# Altium PCB ADC_PCB.PcbDoc
Units mil, origin at the board's own origin, x right, y up, seen from the top; angles counter-clockwise.
Board outline 2055 x 1795 mil, 4 copper layers (Top Layer, Layer 1, Layer 2, Bottom Layer), stack 60.6 mil thick; 32 components, 24 nets, 124 pads, 321 vias.
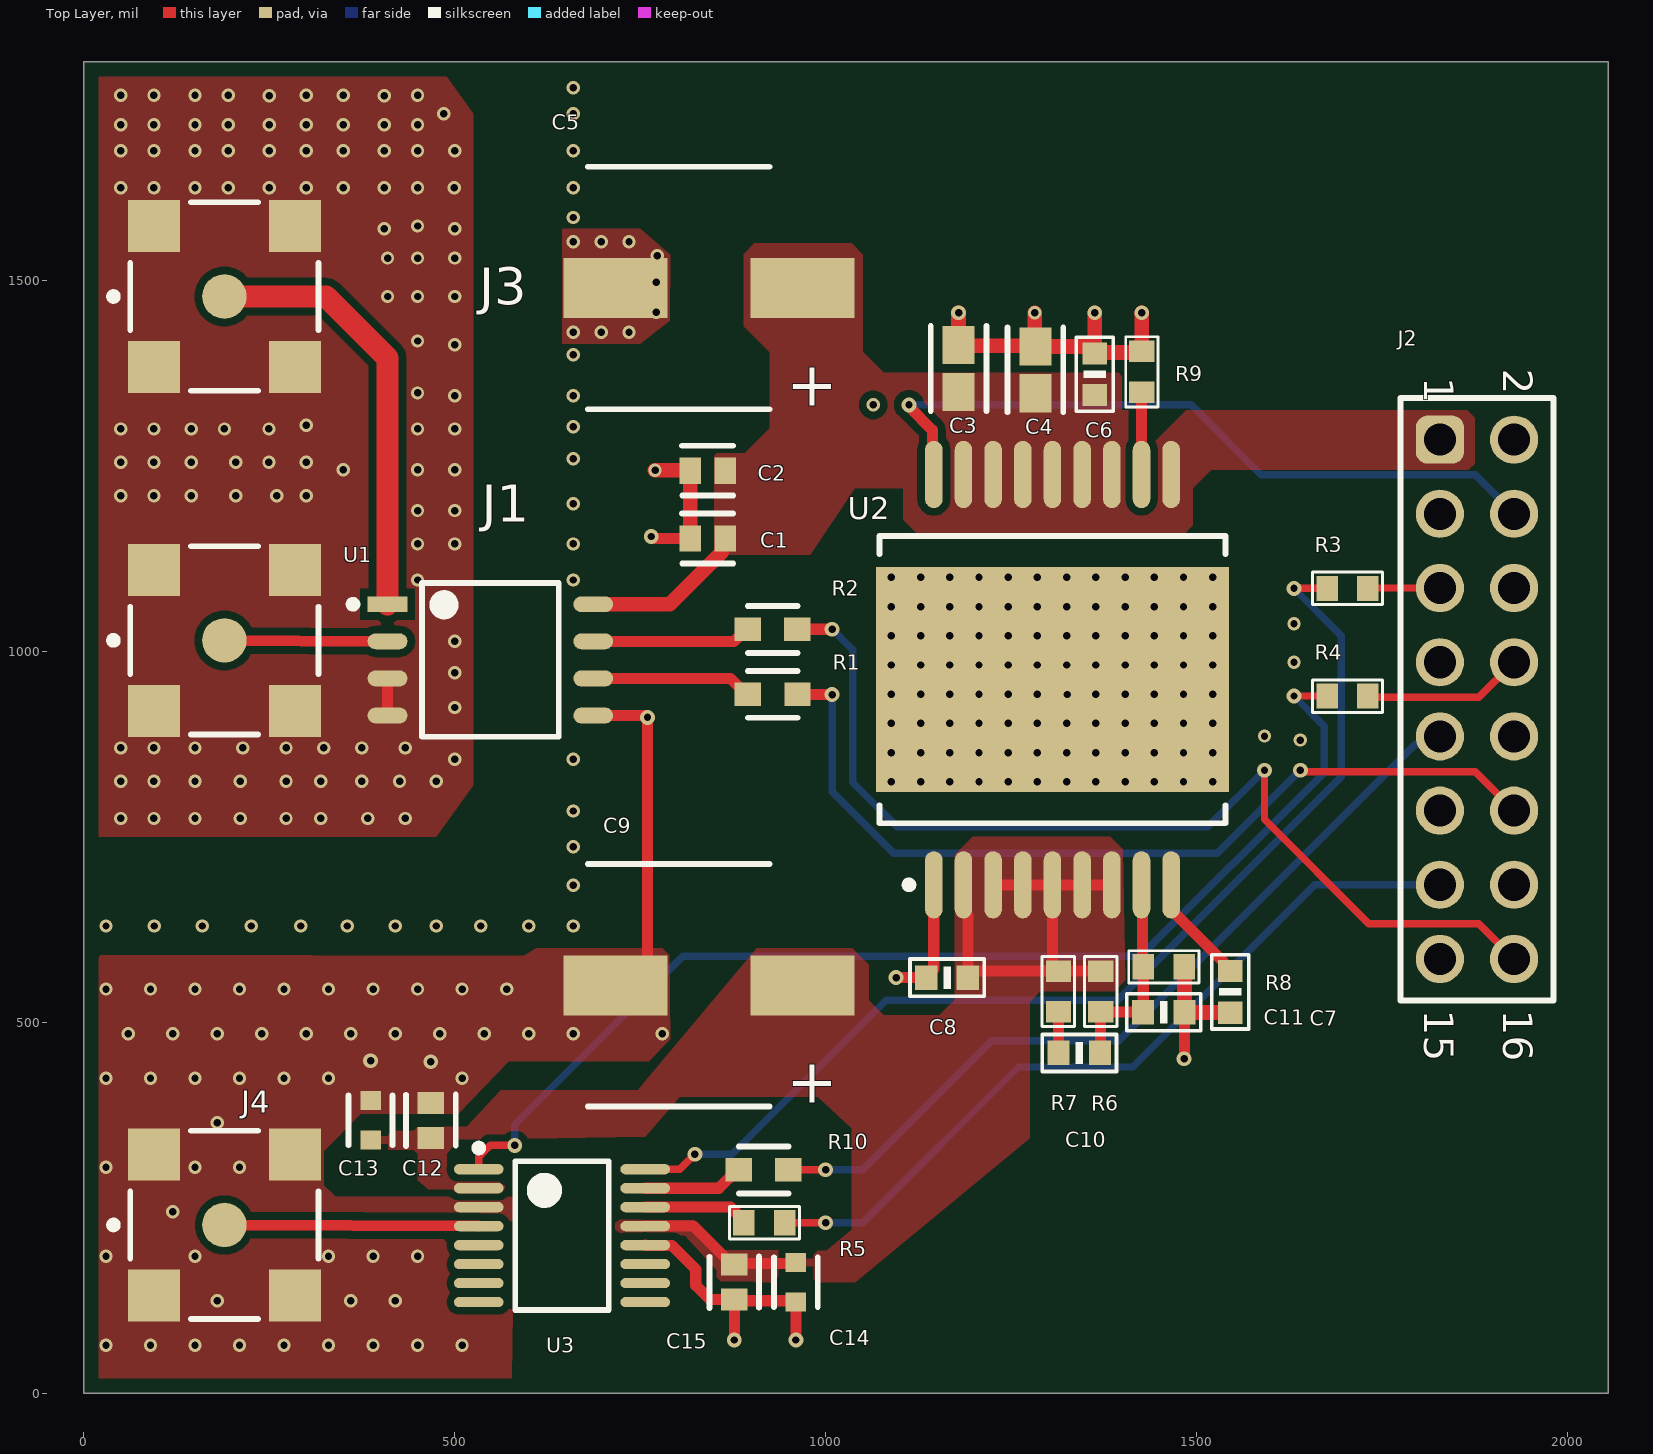
[diagram p0: Top Layer view]
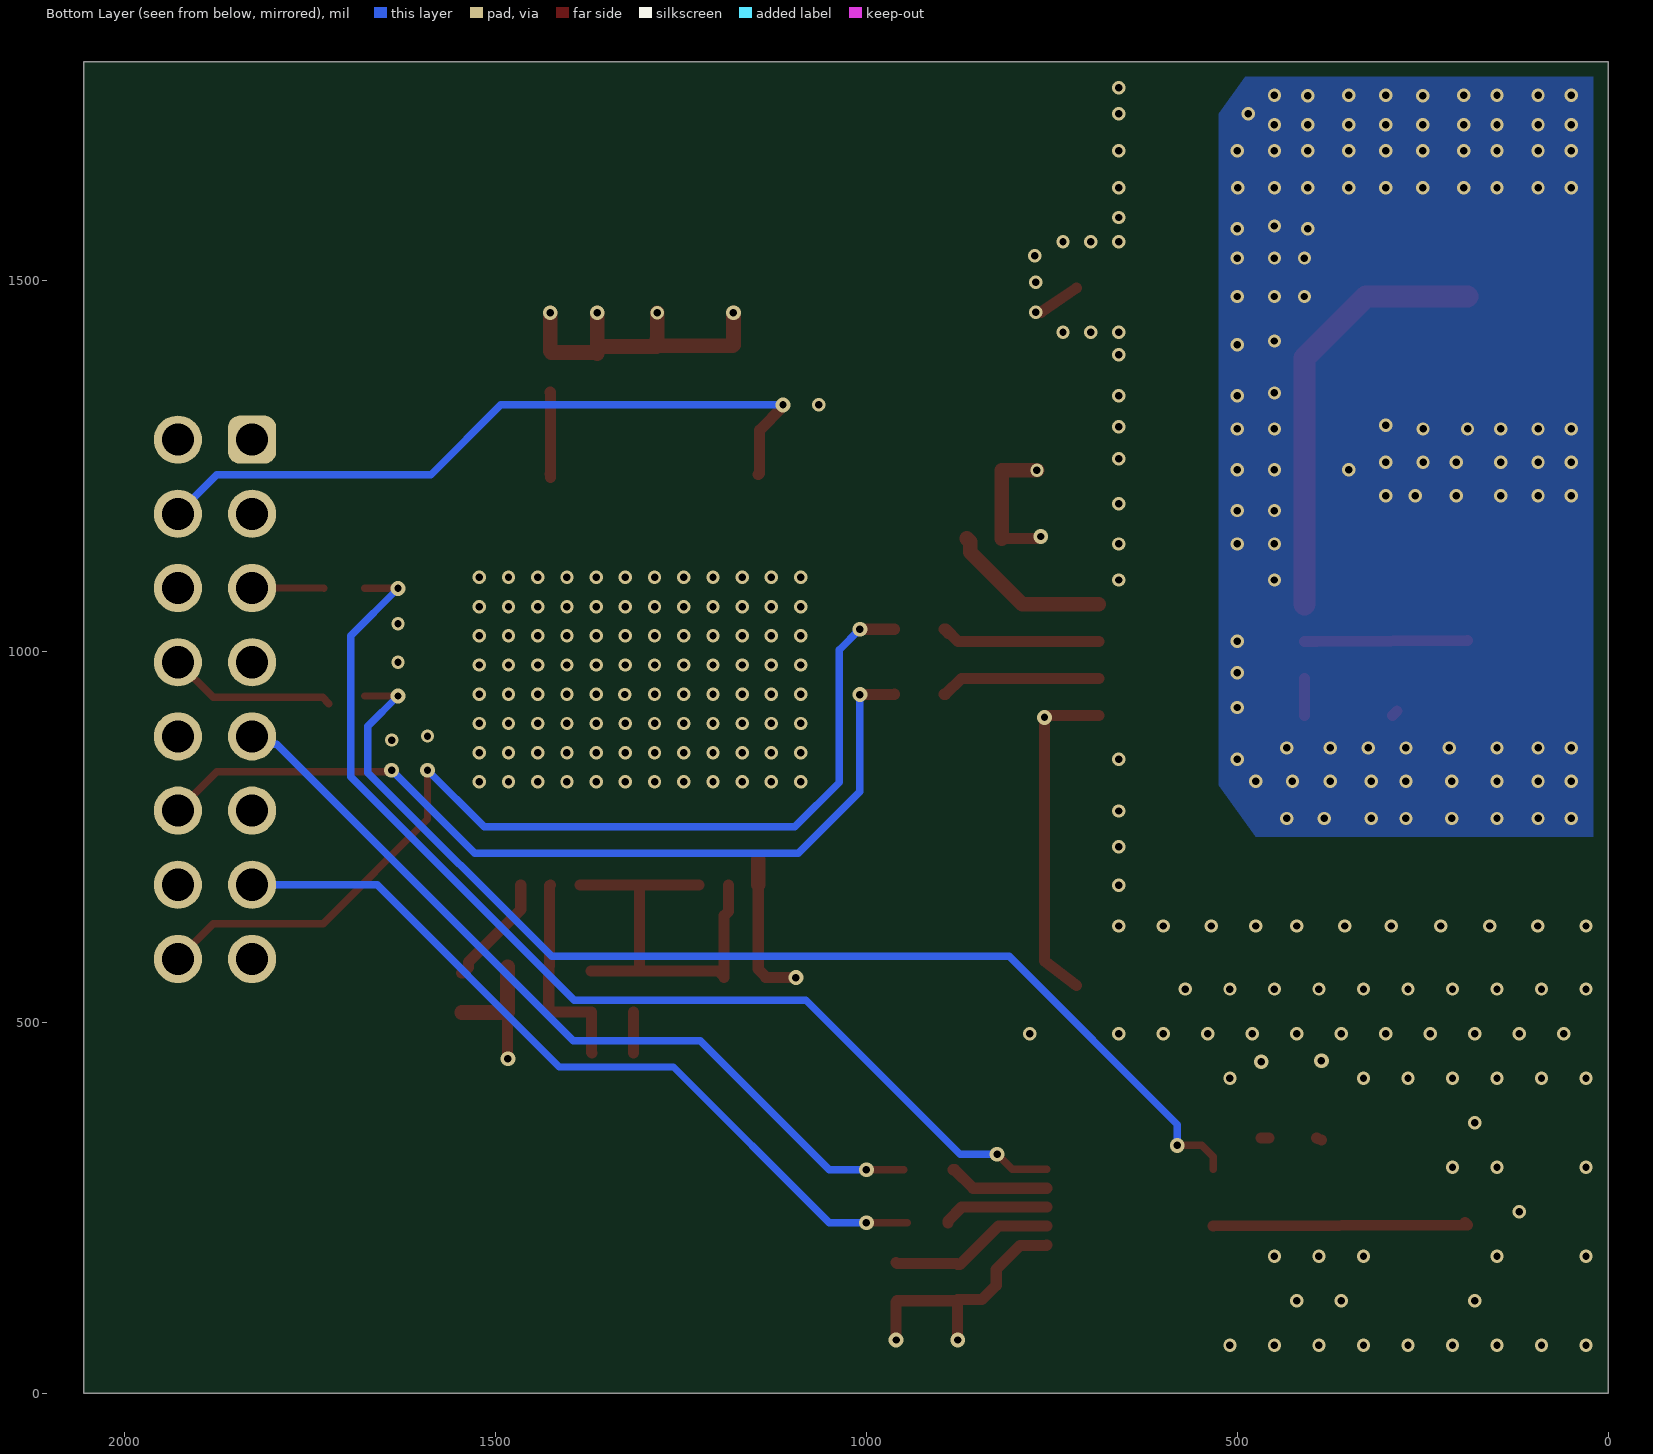
[diagram p1: Bottom Layer view, seen from below]
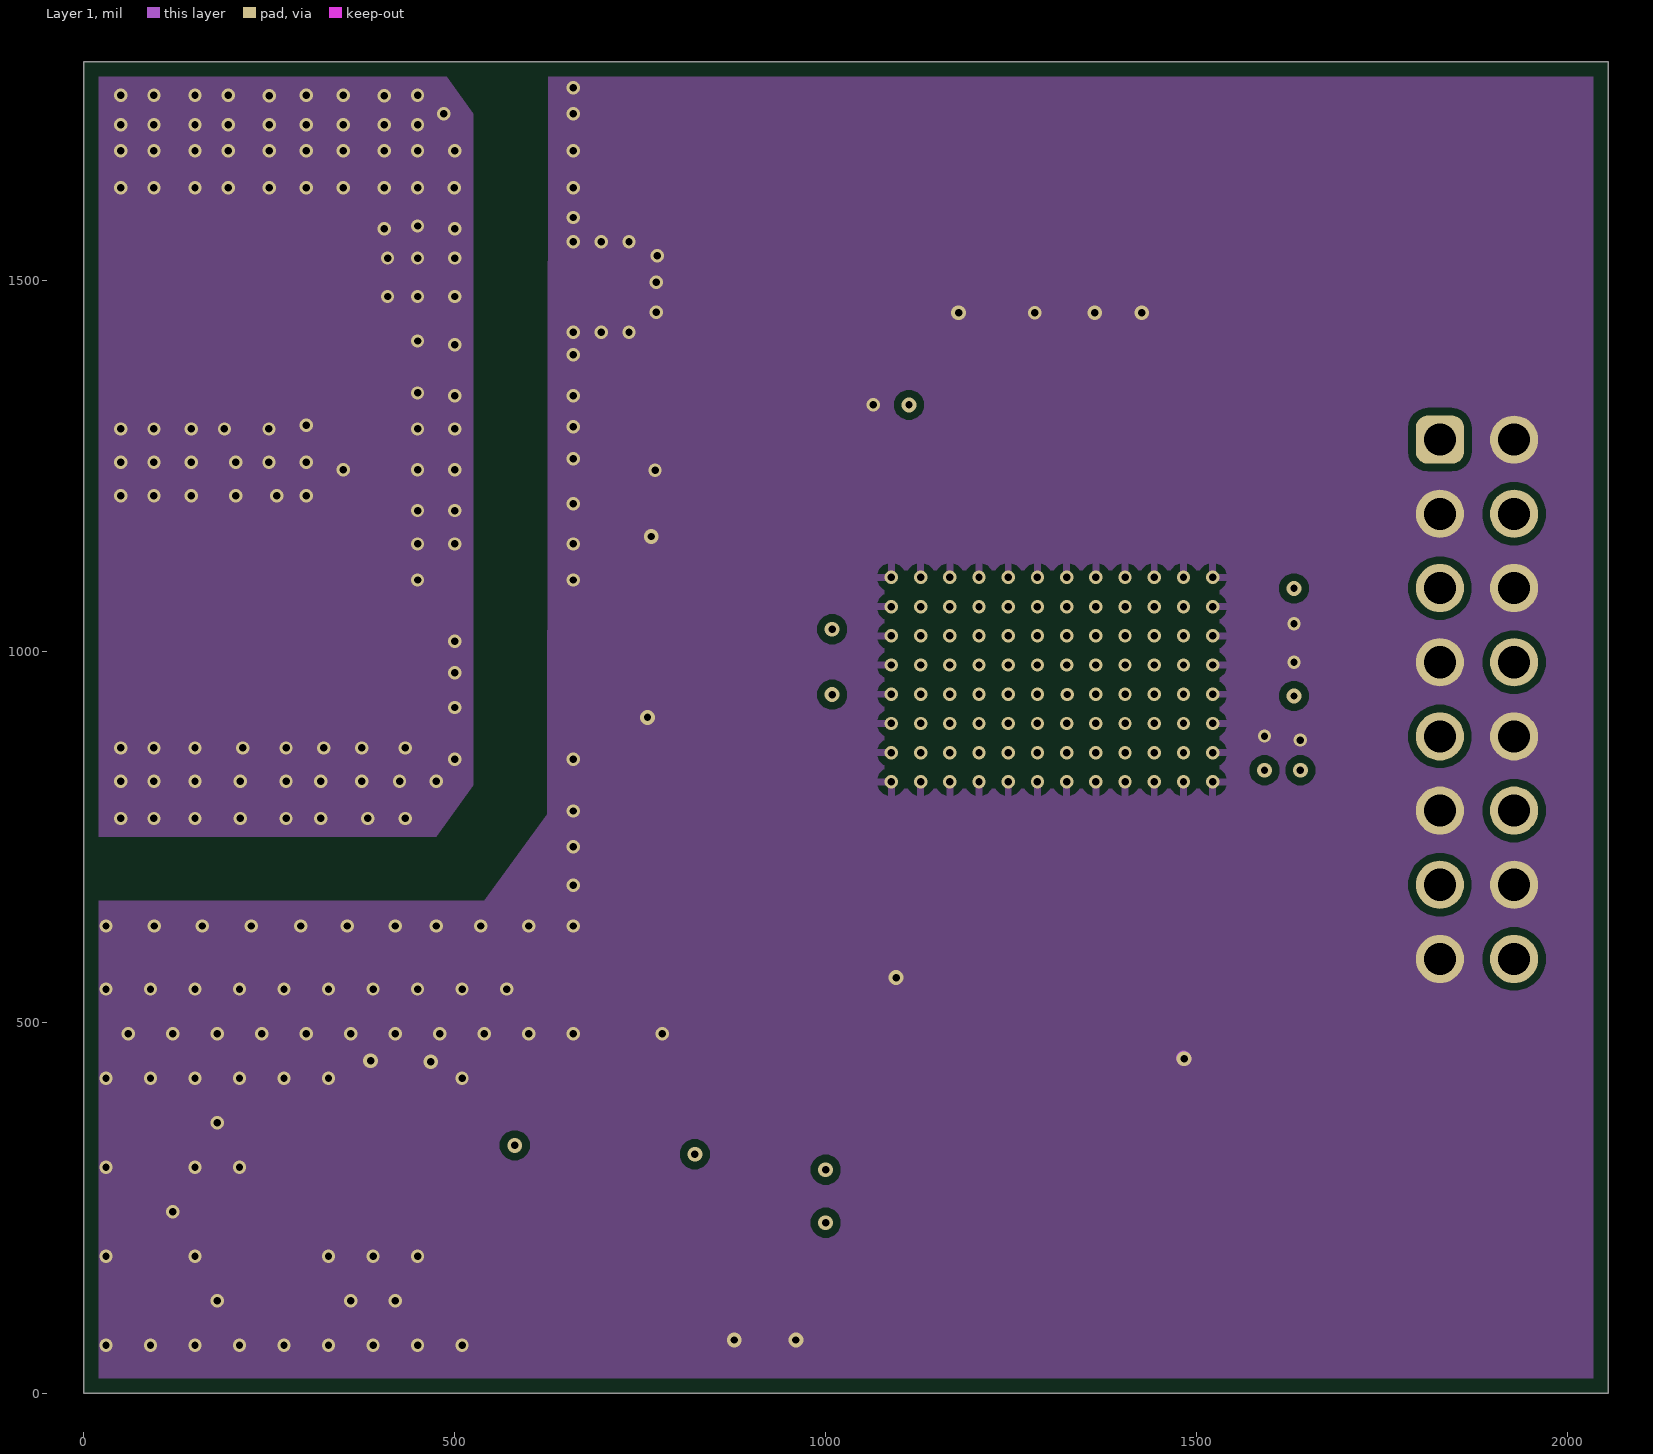
[diagram p2: Layer 1]
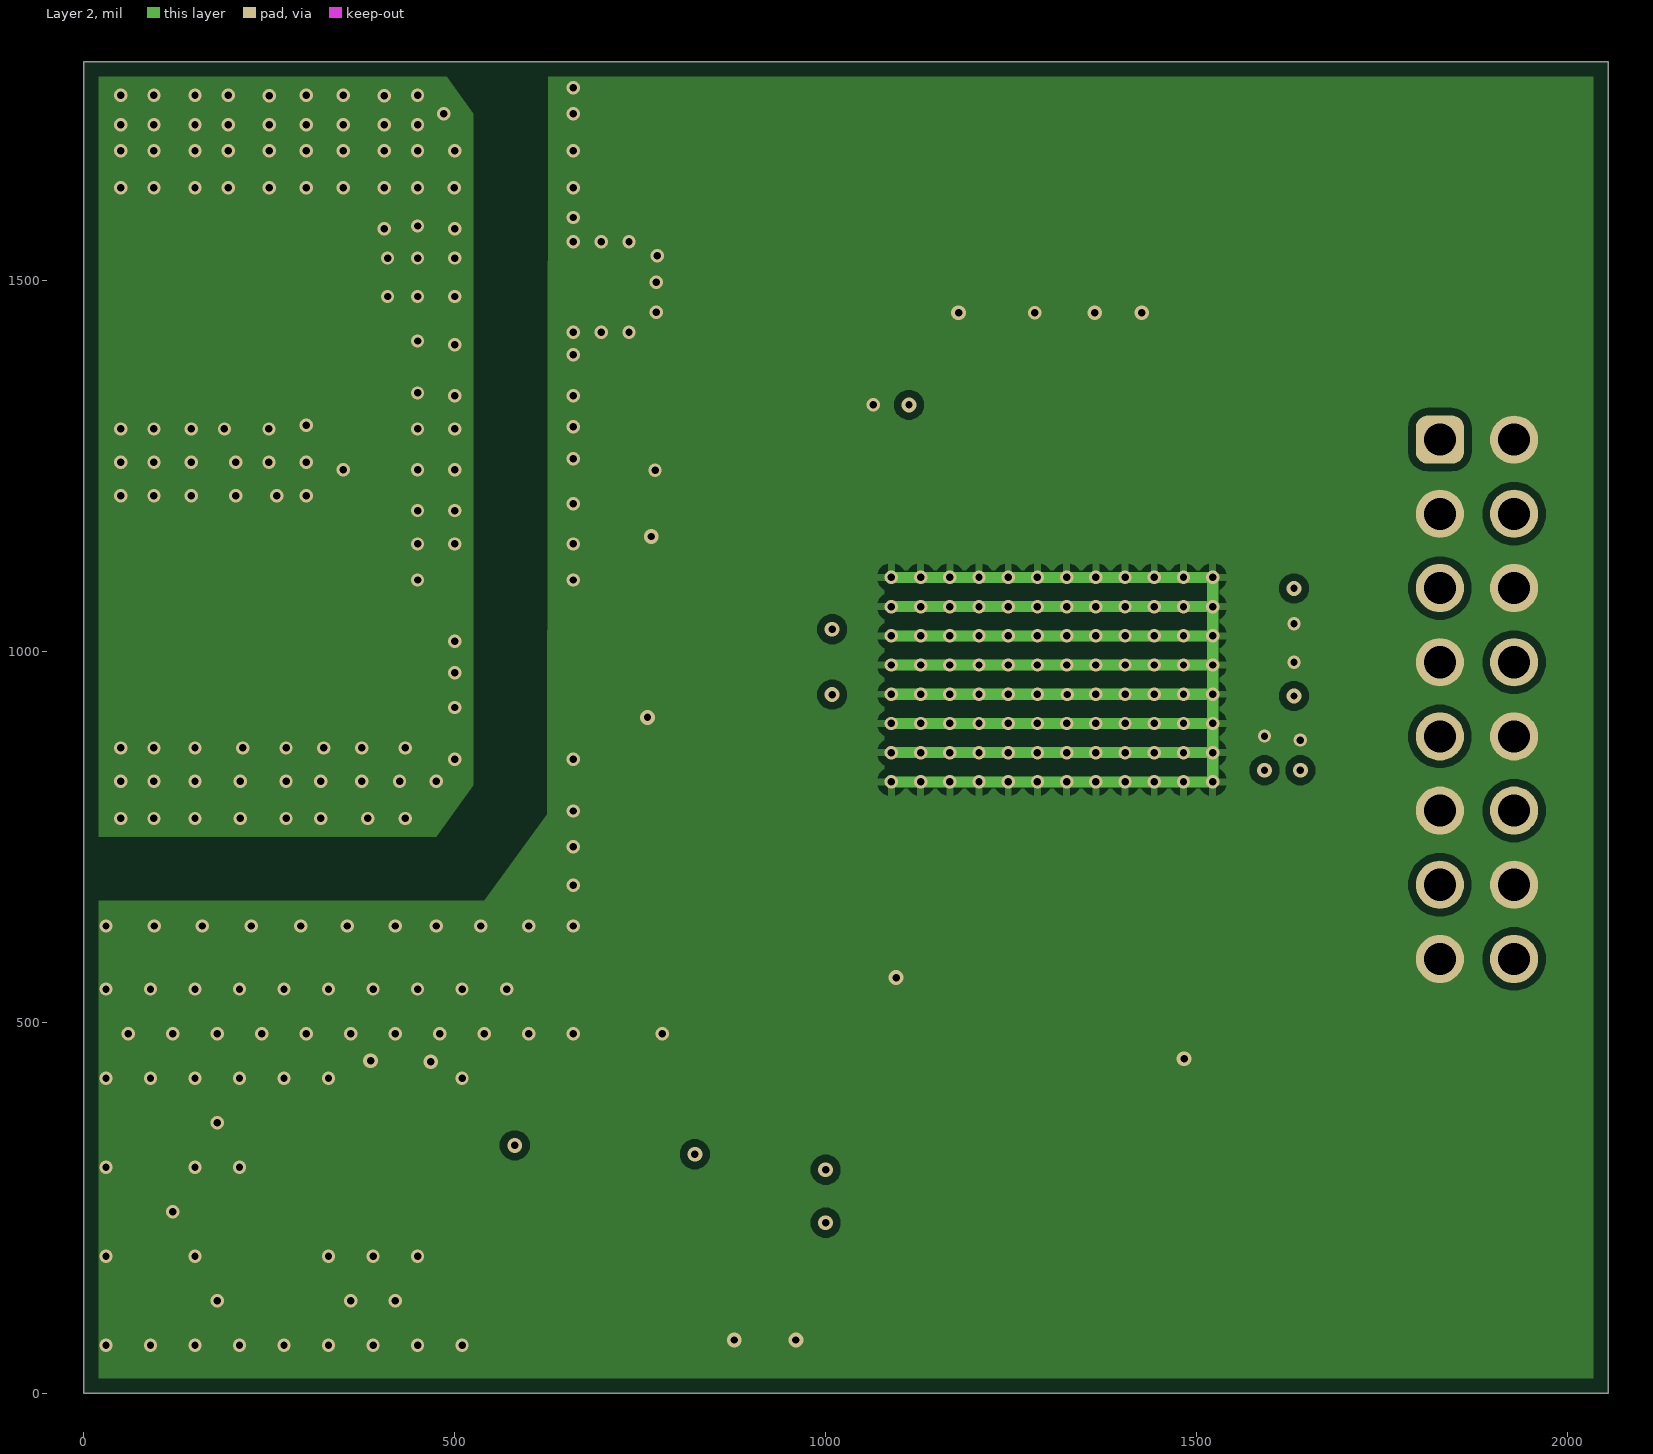
[diagram p3: Layer 2]
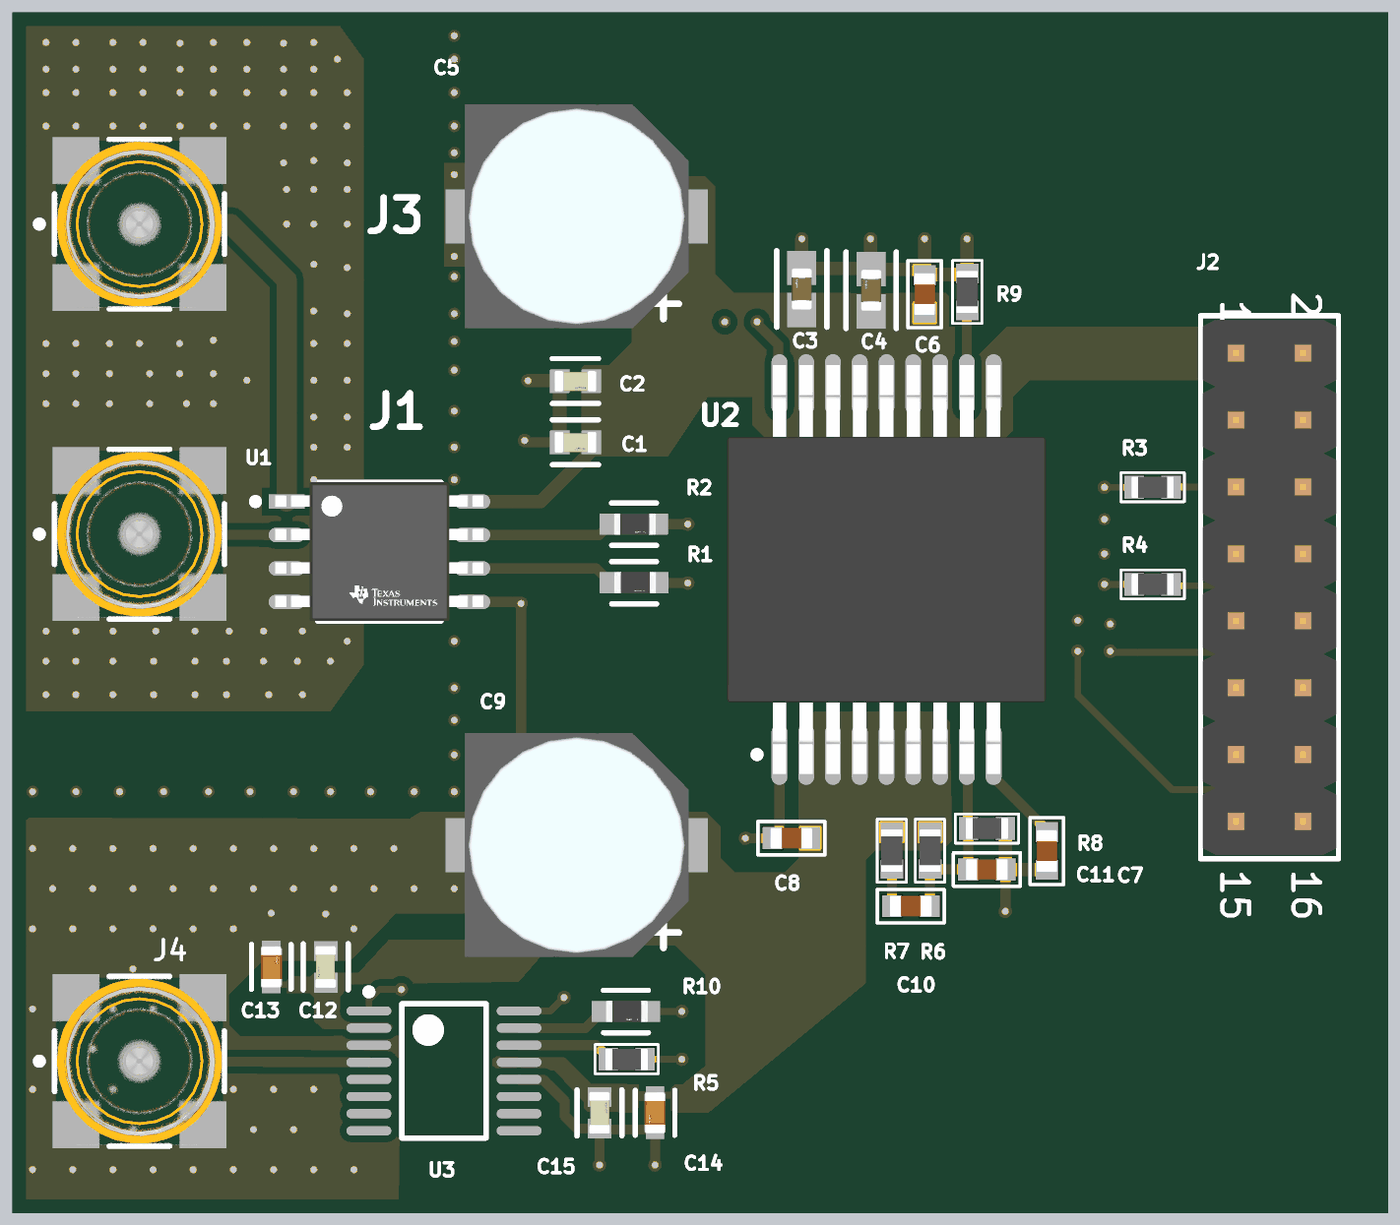
[diagram p4: 3D render of the assembled board from above, using the file's embedded part models]

## Layer stack, top to bottom
Top Solder: solder mask 0.4, Solder Resist, Dk 3.5
Top Layer: signal copper 1.4
Dielectric 2: prepreg 5, PP-006, Dk 4.1
Layer 1: signal copper 1.4
Dielectric 1: dielectric 45, FR-4, Dk 4.8
Layer 2: signal copper 1.4
Dielectric 3: prepreg 5, PP-006, Dk 4.1
Bottom Layer: signal copper 1.4
Bottom Solder: solder mask 0.4, Solder Resist, Dk 3.5

## Board outline
0,0 0,1795 2055,1795 2055,0

## Design rules (kind name [scope] priority, off if disabled: settings)
BoardOutlineClearance [All] p1: gap=20 ignorepadtopadclearanceinfootprint=FALSE
Clearance [All] p1: gap=10 ignorepadtopadclearanceinfootprint=FALSE
MinimumSolderMaskSliver [All] p1: minsoldermaskwidth=5
PolygonConnect [All] p1: connectstyle=Relief reliefconductorwidth=10 reliefentries=4 polygonreliefangle="90 Angle" airgapwidth=10
RoutingVias [All] p1: holewidth=10 width=18 viastyle="Through Hole" minholewidth=8 minwidth=16 maxholewidth=20 maxwidth=28
SilkToSilkClearance [All] p1: silktosilkclearance=5
SilkToSolderMaskClearance [IsPad] p1: minsilkscreentomaskgap=1 clearancetoexposedcopper=TRUE
SolderMaskExpansion [All] p1: expansion=0 istentingtop=FALSE
Width [All] p1: maxlimit=30 minlimit=10 preferedwidth=15
27 further rules are at their usual default settings.

## Components (designator, comment, footprint, x,y, rotation, side; value= is the part's Value field where it differs from the comment)
C1 "C0603C104J5RACTU" FP-C0603C-CF-MFG 841.14,1152.28 r180 top value="0.10 μF"
C2 "C0603C104J5RACTU" FP-C0603C-CF-MFG 841.14,1243.83 r180 top value="0.10 μF"
C3 "GRM188R61E106KA73D" FP-GRM188-0_2-IPC_A 1179.24,1381.5 r90 top value=10uF
C4 "GRM188R61E106KA73D" FP-GRM188-0_2-IPC_A 1282.9,1379.63 r90 top value=10uF
C5 "220uF/25V" CAP_AE830X1050N 842.78,1490 r180 top
C6 "0.1uF/50V" CAPC1608X90N 1362.74,1373.78 r90 top
C7 "0.1uF/50V" CAPC1608X90N 1545.39,541.22 r270 top
C8 "0.1uF/50V" CAPC1608X90N 1163.76,560.42 r180 top
C9 "220uF/25V" CAP_AE830X1050N 842.78,550 r180 top
C10 "4.7nF" CAPC1608X90N 1342.01,458.84 r0 top
C11 "100pF" CAPC1608X90N 1455.82,513.68 r0 top
C12 "C0603C104J5RACTU" FP-C0603C-CF-MFG 467.88,368.03 r90 top value="0.10 μF"
C13 "GCM188R71E105KA64D" FP-GCM188-0_1-MFG 386.64,368.03 r90 top
C14 "GCM188R71E105KA64D" FP-GCM188-0_1-MFG 960,150 r270 top
C15 "C0603C104J5RACTU" FP-C0603C-CF-MFG 876.97,149.97 r270 top value="0.10 μF"
J1 "73251-1350" FP-73251-1350-MFG 189.68,1015 r0 top
J2 "61301621121" 61301621121 1878.05,935.57 r270 top
J3 "73251-1350" FP-73251-1350-MFG 189.68,1478.53 r0 top
J4 "73251-1350" FP-73251-1350-MFG 189.68,227.04 r0 top
R1 "RT0603DRD0722RL" FP-RT0603-MFG 928.58,942.45 r0 top value=22Ω
R2 "RT0603DRD0722RL" FP-RT0603-MFG 928.46,1030 r0 top value=22Ω
R3 "22R" RESC1608X55N 1703.5,1085 r0 top
R4 "22R" RESC1608X55N 1703.5,940 r180 top
R5 "22R" RESC1608X55N 917.56,230 r0 top
R6 "4.32K" RESC1608X55N 1370.89,541.73 r90 top
R7 "2.67K" RESC1608X55N 1313.79,541.73 r90 top
R8 "806R" RESC1608X55N 1455.91,574.97 r180 top
R9 "511R" RESC1608X55N 1426.21,1377.06 r270 top
R10 "RT0603DRD0722RL" FP-RT0603-MFG 916.37,301.45 r0 top value=22Ω
U1 "AMC1203BPSA" FP-PSA0008A-IPC_C 548.18,988.74 r0 top
U2 "ISL75051ASEHVFE" CFP102P1520X310-18AN 1305.82,962.08 r90 top
U3 "ADC128S102CIMTX" MTC16_N 644.64,212.63 r0 top locked

## Footprints (in the part's own frame and the unit in brackets; to place one, negate y for a bottom-side part, rotate by r counter-clockwise, add the part's x,y. Pads: shape width x height; smd on the part's side, far side on the other; paste and mask are expansions set on the pad)
61301621121 [mm] "Pin Header, pitch 2.54 mm, THT, Vertical, dual row, 16p"
  rrect50% 1.65x1.65 hole 1.1: 1(-8.89,-1.27)
  round 1.65 hole 1.1: 2(-8.89,1.27) 3(-6.35,-1.27) 4(-6.35,1.27) 5(-3.81,-1.27) 6(-3.81,1.27) 7(-1.27,-1.27) 8(-1.27,1.27) 9(1.27,-1.27) 10(1.27,1.27) 11(3.81,-1.27) 12(3.81,1.27) 13(6.35,-1.27) 14(6.35,1.27) 15(8.89,-1.27) 16(8.89,1.27)
  silkscreen extent -10.31,-2.62 10.31,2.62, body extent -10.16,-2.54 10.16,2.54, height 8.59
CAP_AE830X1050N [mm]
  rect 3.55x2.05 smd: 1(-3.2,0) 2(3.2,0)
  silkscreen extent -2.07,-4.15 4.15,4.15, body extent -4.25,-4.25 4.25,4.25, height 10.5
CAPC1608X90N [mil]
  rect 30x33 smd mask+2: 1(-28,0) 2(28,0)
  silkscreen extent -50,-25 50,25, body extent -31,-16 31,16, height 35
CFP102P1520X310-18AN [mm]
  oval 2.3x0.6 smd: 1(-7.025,4.064) 2(-7.025,3.048) 3(-7.025,2.032) 4(-7.025,1.016) 5(-7.025,0) 6(-7.025,-1.016) 7(-7.025,-2.032) 8(-7.025,-3.048) 9(-7.025,-4.064) 10(7.025,-4.064) 11(7.025,-3.048) 12(7.025,-2.032) 13(7.025,-1.016) 14(7.025,0) 15(7.025,1.016) 16(7.025,2.032) 17(7.025,3.048) 18(7.025,4.064)
  rect 7.7x12.09 smd paste-5.969: EP(0,0)
  silkscreen extent -7.15,-5.92 4.91,5.92, body extent -7.77,-6.04 7.77,6.04, height 3.1
FP-73251-1350-MFG [mil]
  round 60 smd paste+0 mask+0: 1(0,0)
  rect 70x70 smd paste+0 mask+0: 2(-95,95) 3(95,95) 4(-95,-95) 5(95,-95)
  silkscreen extent -155,-127 127,127, body extent -134,-134 134,134, height 10
FP-C0603C-CF-MFG [mm]
  rect 0.75x0.9 smd paste+0 mask+0: 1(-0.6,0) 2(0.6,0)
  silkscreen extent -0.87,-0.85 0.88,0.85, body extent -1.2,-0.6 1.2,0.6, height 0.25
FP-GCM188-0_1-MFG [mm]
  rect 0.65x0.7 smd paste+0 mask+0: 1(-0.675,0) 2(0.675,0)
  silkscreen extent -0.85,-0.75 0.85,0.75, body extent -1.1,-0.55 1.1,0.55, height 0.25
FP-GRM188-0_2-IPC_A [mil]
  rect 51.38x43.55 smd paste+0 mask+0: 1(-31.52,0) 2(31.52,0)
  silkscreen extent -57,-38 57,38, body extent -77,-41 77,41, height 10
FP-PSA0008A-IPC_C [mil]
  rect 53.76x21.49 smd paste+0 mask+0: 1(-138.6,75)
  rrect100% 53.76x21.49 smd paste+0 mask+0: 2(-138.6,25) 3(-138.6,-25) 4(-138.6,-75) 5(138.6,-75) 6(138.6,-25) 7(138.6,25) 8(138.6,75)
  silkscreen extent -190,-104 92,104, body extent -169,-108 169,108, height 10
FP-RT0603-MFG [mm]
  rect 0.9x0.8 smd paste+0 mask+0: 1(-0.85,0) 2(0.85,0)
  silkscreen extent -0.85,-0.81 0.86,0.8, body extent -1.4,-0.55 1.4,0.55, height 0.25
MTC16_N [mm] "TSOP, 16-Leads, Body 5x4.4mm, Pitch 0.65mm, IPC Medium Density"
  oval 1.7x0.35 smd: 1(-2.85,2.275) 2(-2.85,1.625) 3(-2.85,0.975) 4(-2.85,0.325) 5(-2.85,-0.325) 6(-2.85,-0.975) 7(-2.85,-1.625) 8(-2.85,-2.275) 9(2.85,-2.275) 10(2.85,-1.625) 11(2.85,-0.975) 12(2.85,-0.325) 13(2.85,0.325) 14(2.85,0.975) 15(2.85,1.625) 16(2.85,2.275)
  silkscreen extent -2.97,-2.55 1.6,3.12, body extent -2.25,-2.55 2.25,2.55, height 1.1
RESC1608X55N [mil]
  rect 29x34 smd mask+2: 1(-27.56,0) 2(27.56,0)
  silkscreen extent -47,-22 47,22, body extent -31,-16 31,16, height 22

## Part data
C1 C2 C12 C15: library part CMP-2006-03056-2, "CAP CER 0.1UF 50V 5% X7R 0603", Capacitance="0.10 μF", Manufacturer=KEMET, Package=C0603C-CF, Temperature="-55°C to +125°C", Temperature Characteristic=X7R, Temperature Coefficient=30ppm/°C, Temperature Range High=+125°C, Temperature Range Low=-55°C, Tolerance=0.05, Voltage Rating="50 V", Automotive=Yes, Automotive Grade="Grade 1", Category=Cap, ComponentLink2Description=Datasheet, ComponentLink2URL=https://api.kemet.com/component-edge/download/datasheet/C0603C100J5GACAUTO.pdf, Device Class L1="Passive Components", Device Class L2=Capacitors, Device Class L3="Ceramic Capacitors", Digikey Description="CAP CER 0.1UF 50V 5% X7R 0603", Height=0.87mm, Lead Free=Yes, Manufacturer Part Number=C0603C104J5RACTU, Material=Ceramic, Mouser Description="Multilayer Ceramic Capacitors MLCC - SMD/SMT 50volts 0.1uF X7R 5%", Octopart=https://octopart.com/c0603c104j5ractu-kemet-10440638, RoHS=TRUE
C3 C4: library part CMP-06035-045268-1, "Chip Multilayer Ceramic Capacitors for General Purpose, 0603, 10uF, X5R, 15%, 10%, 25V", Case/Package=0603
C5 C9: library part "CAP ALUM 220UF 20% 25V SMD", "CAP ALUM 220UF 20% 25V SMD", Manufacturer="United Chemi-Con", Manufacturer Part Number=EMZA250ADA221MHA0G, Supplier Part Number 1=565-2550-1-ND, Tolerance=±20%, ComponentLink1Description="New link", Height=10.5mm
  C5: Supplier 1=DigiKey, Supplier 2=Mouser, Supplier Part Number 2=667-EEE-FK1E221P
  C9: Supplier 1=Digi-Key
C6 C7 C8: library part "CAP CER 0.1UF 50V X7R 0603", "CAP CER 0.1UF 50V X7R 0603", Manufacturer="Samsung Electro-Mechanics", Manufacturer Part Number=CL10B104KB8NNNC, Package=0603, Supplier Part Number 1=1276-1000-1-ND, Tolerance=±10%, Voltage - Rated=50V, ComponentLink1Description="New link", Height=0.9mm, Supplier 1=Digi-Key
C10: library part "CAP CER 4700PF 50V C0G 0603", "CAP CER 4700PF 50V C0G 0603", Manufacturer="TDK Corporation", Manufacturer Part Number=CGA3E2C0G1H472J080AA, Package=0603, Supplier Part Number 1=445-6912-1-ND, Tolerance=5%, Voltage - Rated=50V, ComponentLink1Description="New link", Height=0.9mm, Supplier 1=Digi-Key
C11: library part "CAP CER 100PF 50V C0G/NP0 0603", "CAP CER 100PF 50V C0G/NP0 0603", Manufacturer="KYOCERA AVX", Manufacturer Part Number=06035A101FAT2A, Package=0603, Supplier Part Number 1=478-6202-1-ND, Tolerance=1%, Voltage - Rated=50V, ComponentLink1Description="New link", Height=0.9mm, Supplier 1=Digi-Key
C13 C14: library part CMP-2006-02363-4, Capacitance=1µF, Case Code (Imperial)=0603, Case Code (Metric)=1608, Dielectric=X7R, Manufacturer Lifecycle Status="IN PRODUCTION", Max Operating Temperature=125°C, Min Operating Temperature=-55°C, Ratings=AEC-Q200, Tolerance=10%, Voltage=25V, Case/Package=0603, Depth=800µm, Height=800µm, Lead Free="Lead Free", Length=1.6mm, Lifecycle Status=Production, Material=Ceramic, Mount="Surface Mount", NexarPartId=18909256, Packaging="Cut Tape", Radiation Hardening=No, REACH SVHC="No SVHC", RoHS=Compliant, Schedule B="8532240020, 8532240020", Termination=SMD/SMT, Thickness=889µm, Voltage Rating=25V, Voltage Rating (DC)=25V, Weight=6.293594mg, Width=787.4µm
J1 J3 J4: library part CMP-04764-000006-1, "CONN SMA JACK STR 50 OHM SMD", Frequency=18GHz, Manufacturer=Molex, Temperature="-65°C to +165°C", Temperature Range High=+165°C, Temperature Range Low=-65°C, Voltage Rating=500V, Automotive=No, Category=Conn, ComponentLink2Description=Datasheet, ComponentLink2URL=https://www.molex.com/pdm_docs/sd/732511350_sd.pdf, Conn Orientation=Straight, Contact Material=Gold, Device Class L1=Connectors, Device Class L2="RF / Coaxial Connectors", Device Class L3=unset, Digikey Description="CONN SMA JACK STR 50 OHM SMD", Footprint Url=https://forum.upverter.com/uploads/default/original/3X/d/a/daeafa2ce4908d4fc4e49f0b17d7d2c986fce444.pdf, Height=9.655mm, Impedance=50Ω, Is Female=yes, Lead Free=Yes, Manufacturer Part Number=73251-1350, Mouser Description="RF Connectors / Coaxial Connectors SMA ST PCB-JCK STD SMT", Number of Contacts=1, Octopart=https://octopart.com/73251-1350-molex-5414390, Package=73251-1350, RoHS=TRUE, Shielding=true, Standoff Height=0.41mm
J2: library part CMP-1502-01097-2, Color=Black, Contact Resistance=20mΩ, Current Rating=3A, Max Operating Temperature=105°C, Min Operating Temperature=-40°C, Operating Supply Voltage=250V, Connector Type="Male Pin", Contact Material=Copper, Contact Mating Length=5.9944mm, Contact Plating=Gold, Gender=Male, Height=8.89mm, Lead Pitch=2.54mm, Mount="Through Hole", NexarPartId=32855550, Number of Contacts=16, Number of Pins=16, Number of Positions=16, Number of Rows=2, Orientation=Vertical, Packaging=Bulk, Pitch=2.54mm, REACH SVHC=Unknown, RoHS=Compliant, Row Spacing=2.54mm, Termination=Solder, Voltage Rating=250V
R1 R2 R10: library part CMP-03412-013306-1, "RES SMD 22 OHM 0.5% 1/10W 0603", Manufacturer=Yageo, Package=RT0603, Power Rating=0.1W, Resistance=22Ω, Temperature="-55°C to +155°C", Temperature Coefficient="25 ppm/°C", Temperature Range High=+155°C, Temperature Range Low=-55°C, Tolerance=0.005, Voltage Rating=75V, Automotive=No, Category=Res, ComponentLink2Description=Datasheet, ComponentLink2URL=http://www.yageo.com/documents/recent/PYu-RT_1-to-0.01_RoHS_L_9.pdf, Composition="Thin Film", Device Class L1="Passive Components", Device Class L2=Resistors, Device Class L3="Chip SMD Resistors", Digikey Description="RES SMD 22 OHM 0.5% 1/10W 0603", Footprint Url=http://www.yageo.com/exep/pages/download/literatures/PYu-R_Mount_10.pdf, Height=0.55mm, Ipc Land Pattern Name=RESC16080X45, Lead Free=Yes, Manufacturer Part Number=RT0603DRD0722RL, Octopart=https://octopart.com/rt0603drd0722rl-yageo-1189544, RoHS=TRUE, Series=RT
R3 R4 R5: library part "RES SMD 22 OHM 0.5% 1/10W 0603", "RES SMD 22 OHM 0.5% 1/10W 0603", Manufacturer=Yageo, Manufacturer Part Number=RT0603DRD0722RL, Package=0603, Supplier Part Number 1=13-RT0603DRD0722RLCT-ND, Tolerance=0.5%, Height=0.55mm, Supplier 1=Digi-Key
R6: library part "RES SMD 4.32K OHM 0.5% 1/5W 0603", "RES SMD 4.32K OHM 0.5% 1/5W 0603", Manufacturer="Panasonic Electronic Components", Manufacturer Part Number=ERJ-PB3D4321V, Package=0603, Supplier Part Number 1=P20355CT-ND, Tolerance=0.5%, Height=0.55mm, Supplier 1=Digi-Key
R7: library part "RES SMD 2.67KOHM 0.5% 1/10W 0603", "RES SMD 2.67KOHM 0.5% 1/10W 0603", Manufacturer=Yageo, Manufacturer Part Number=RT0603DRD072K67L, Package=0603, Supplier Part Number 1=311-2.67KDCT-ND, Tolerance=0.5%, Height=0.55mm, Supplier 1=Digi-Key
R8: library part "RES SMD 806 OHM 0.5% 1/10W 0603", "RES SMD 806 OHM 0.5% 1/10W 0603", Manufacturer=Yageo, Manufacturer Part Number=RT0603DRD0762KL, Package=0603, Supplier Part Number 1=311-806DCT-ND, Tolerance=0.5%, Height=0.55mm, Supplier 1=Digi-Key
R9: library part "RES SMD 511 OHM 1% 1/10W 0603", "RES SMD 511 OHM 1% 1/10W 0603", Manufacturer="Panasonic Electronic Components", Manufacturer Part Number=ERJ-3EKF5110V, Package=0603, Supplier Part Number 1=P511HCT-ND, Tolerance=0.5%, Height=0.55mm, Supplier 1=Digi-Key
U1: library part CMP-04860-000036-1, "IC ADC 16BIT SIGMA-DELTA 8SOP", Case/Package=SOP, Max Operating Temperature=105°C, Max Power Dissipation=110mW, Max Supply Voltage=5.5V, Min Operating Temperature=-40°C, Min Supply Voltage=4.5V, Operating Supply Voltage=5V, Package Quantity=95, Power Consumption=80mW, Contact Plating=Gold, Differential Nonlinearity=1LSB, Input Type=DIFFERENTIAL, Integral Nonlinearity (INL)=6LSB, Interface=Serial, Lead Free="Lead Free", Mount="Surface Mount", Number of A/D Converters=1, Number of Analog Inputs=1, Number of Bits=16, Number of Channels=1, Number of Converters=1, Number of Elements=1, Number of Inputs=1, Number of Pins=8, Packaging=Rail/Tube, Polarity=Bipolar, Power Dissipation=80mW, Resolution=16b, RoHS Compliant=Yes, Sampling Rate=40KS/s, Signal to Noise Ratio (SNR)=85dB, Supply Type=Analog
U2: library part CMP-040-000002-1, "Voltage regulator, linear, variable, 3 A, CFP-18 exposed pad, class V", EM Part Number=ISL75051ASEHFE/PROTO, FM (SMD) Part Number=5962R1121203VYC, Input Voltage High=6V, Input Voltage Low=2.2V, Manufacturer="Renesas / Intersil", Output Current Max=3A, Output Voltage="0.8 - 5.0V", Package="CFP-18 (exposed pad)", Available Preview Images=2D, ComponentLink1Description="Datasheet - Manufacturer", ComponentLink1URL=https://www.renesas.com/us/en/www/doc/datasheet/isl75051aseh-3051aseh.pdf, ComponentLink2Description="Datasheet - Mil Spec", ComponentLink2URL=https://landandmaritimeapps.dla.mil/downloads/milspec/smd/11212.pdf, Design Item ID=ISL75051ASEHVFE, Device Class=V, Distributor=Avnet, Lead Form=Yes, Manufacturer Part Number=ISL75051ASEHVFE, Mass=1.07g, Mount Type=SMT, SEL=86.3MeV*cm2/mg, Source=IsolatedADCs.SCHLIB, TID="50krad (LDR), 100krad (HDR)"
U3: library part CMP-0054-00337-2, "8-Channel, 500 kSPS to 1 MSPS, 12-Bit A/D Converter, 16-pin TSSOP", Manufacturer="National Semiconductor", PackageTopMarking=NSUZXYTT*128S102*CIMT, PowerWise=Y, Code_JEDEC=MO-153-AB, ComponentLink1Description="ADC128S102 Datasheet", ComponentLink1URL=http://www.national.com/ds/AD/ADC128S102.pdf, ComponentLink2Description="ADC128S102 Web Page", ComponentLink2URL=http://www.national.com/pf/AD/ADC128S102.html, ComponentLink3Description="MTC16 Package Page", ComponentLink3URL=http://www.national.com/packaging/folders/mtc16.html, CompType="ADC IC", DatasheetVersion=Jul-2009, PackageDescription="Molded TSSOP, Jedec, 5 x 4.4 x 0.9mm Body, 16 Lead, 0.65mm Pitch", PackageReference=MTC16, PackageVersion="revD, Jun-2003", PinCount=16, RevisionNote="Component URLs added", RoHS=N

## Via types
v1: diameter 18, hole 10, Top Layer to Bottom Layer, tented both sides, 203 vias
v2: diameter 18, hole 10, Top Layer to Bottom Layer, 96 vias
v3: diameter 20, hole 10, Top Layer to Bottom Layer, tented both sides, 22 vias

## Nets (pads, with @x,y where several pads share a name; then routed paths per layer and width w, separated by ;. In a path a pad name is that pad's centre, name@x,y a point inside that pad or via, vN(x,y) a via of type N, cw(c..) or ccw(c..) an arc to the next point about the centre after c; other vN are vias at no path point)
3V3: C8.1 C9.1 C12.1 C13.1 C14.1 C15.1 R6.2 R7.2 U2.2 U2.3 U2.4 U2.5 U2.6 U2.7 U3.2 U3.13 | length 821.9
  Top Layer w15: C13.1 C13.1@392.92,344.03 ; C12.1@457.67,344.03 C12.1 ; U3.13 822.19,225.43 874.02,173.59 C15.1 878.46,175.08 958.51,175.08 C14.1 ; U2.2 1185.82,649.71 1191.76,643.77 C8.1@1191.76,561.79 ; C8.1 C8.1@1191.76,561.79 ; U2.3 U2.4 U2.5 ; R7.2@1305.82,576.29 U2.5 ; R6.2 R7.2 1199.26,569.29 C8.1@1191.76,561.79 ; U2.7 U2.6 U2.5
+5V: C1.1 C2.1 C3.1 C4.1 C5.1 C6.1 J2.1 U1.8 U2.10 U2.12 U2.13 U2.14 U2.15 U2.16 U2.17 | length 222.6
  Top Layer w20: U1.8 789.74,1063.74 860,1134 860,1147.52 C1.1
+5V_AN: J3.1 U1.1 | length 586
  Top Layer w30: J3.1 326.47,1478.53 409.58,1395.42 U1.1
AGND: J1.2 J1.3 J1.4 J1.5 J3.2 J3.3 J3.4 J3.5 U1.3 U1.4 | length 58.9
  Top Layer w15: J1.5 J1.5@290.94,913.74 ; U1.4 U1.3
  other v1: 50,775 94.68,775 150,775 210.89,775 272.74,775 319.68,775 382.7,775 433.31,775 50,825 94.68,825 150,825 210.89,825 272.74,825 319.68,825 375,825 425.72,825 475,825 500,855 50,870 94.68,870 150,870 214.24,870 272.74,870 323.62,870 375,870 433.31,870 500,924.48 500,971.34 500,1013.74 450,1096.42 450,1145 500,1145 450,1190 500,1190 50,1210 94.68,1210 145,1210 205,1210 260,1210 300,1210 350,1245 450,1245 500,1245 50,1255 94.68,1255 145,1255 205,1255 249.68,1255 300,1255 50,1300 94.68,1300 145,1300 189.68,1300 249.68,1300 450,1300 500,1300 300,1305 500,1344.59 450,1348.53 500,1413.44 450,1418.53 409.58,1478.53 450,1478.53 500,1478.53 409.58,1530.35 450,1530.35 500,1530.35 405,1570 500,1570 450,1573.53 50,1625 94.68,1625 150,1625 195,1625 250.29,1625 300,1625 350,1625 405,1625 450,1625 499.65,1625 50,1675 94.68,1675 150,1675 195,1675 250.29,1675 300,1675 350,1675 405,1675 450,1675 500,1675 50,1710 94.68,1710 150,1710 195,1710 250.29,1710 300,1710 350,1710 405,1710 450,1710 485.37,1725 250.29,1748.94 405,1748.94 50,1750 94.68,1750 150,1750 195,1750 300,1750 350,1750 450,1750
CS: R4.2 U3.1 | length 1552
  Top Layer w10: U3.1 532.44,318.83 547.91,334.31 v3(580.93,334.31) ; v3(1631.34,940) R4.2
  Bottom Layer w10: v3(580.93,334.31) 580.93,362.48 807.42,588.98 1424.33,588.98 1672.01,836.65 1672.01,899.34 v3(1631.34,940)
DIN: R5.1 U3.14 | length 143.3
  Top Layer w15: U3.14 871.48,251.02 890,232.5 R5.1
DOUT: J2.9 R10.2 | length 1118.7
  Top Layer w10: R10.2 v3@998.55,301.45
  Bottom Layer w10: v3(1000,301.45) 1050,301.45 1223.89,475.34 1395.34,475.34 1795.06,875.06 1817.54,875.06 J2.9
GND: C1.2 C2.2 C3.2 C4.2 C5.2 C6.2 C7.2 C8.2 C9.2 C11.2 C12.2 C13.2 C14.2 C15.2 J2.2 J2.3 J2.6 J2.7 J2.10 J2.11 J2.14 J2.15 J4.2 J4.3 J4.4 J4.5 R8.1 R9.1 U1.5 U2.1 U2.EP U3.3 U3.12 | length 5628.4
  Top Layer w15: U1.5 756.06,913.74 758.54,911.26 v3(759.89,911.26) 759.89,582.85 C9.2 ; C5.2 C5.2@765,1457.15 ; U3.12 757.46,199.22 792.93,199.22 825,167.16 825,145.55 844.2,126.35 C15.2 ; v3(765,1155) 766.35,1155 769.07,1152.28 C1.2 ; v3(876.97,71.97) C15.2 ; v3@960,70 C14.2 958.54,124.89 878.43,124.89 C15.2 ; v3(1095,560.42) C8.2 1135.76,561.92 1145.82,571.98 U2.1 ; v3(1483.29,451.12) 1483.56,451.39 1483.56,513.42 C11.2
  Top Layer w20: v1(770.1,1244.42) 812.76,1244.42 C2.2 C1.2 ; U2.1 U2.1@1145.82,719.95 ; v3(1179.24,1456.52) 1179.24,1428.7 C3.2 1180.17,1412.08 1281.96,1412.08 C4.2 ; v1(1281.96,1456.52) 1281.96,1426.84 C4.2 ; C6.2@1351.87,1411.15 C4.2 ; v3(1362.74,1456.52) C6.2 1364.16,1403.2 1424.79,1403.2 R9.1 v3(1426.21,1456.52) ; R8.1 1483.65,574.79 1483.65,513.86 C11.2 1484.05,513.45 1545.15,513.45 C7.2
  Layer 1 w20: v3@1482.4,452.02 v3(1483.29,451.12)
  Layer 2 w15: v2(1088.7,824.29) v2(1128.07,824.29) v2(1167.44,824.29) v2(1206.81,824.29) v2(1403.66,824.29) v2(1443.03,824.29) v2(1521.77,824.29) v2(1521.77,863.66) ; v2(1088.7,863.66) v2(1167.44,863.66) v2(1206.81,863.66) v2(1246.18,863.66) v2(1285.55,863.66) v2(1324.92,863.66) v2(1364.29,863.66) v2(1403.66,863.66) v2(1443.03,863.66) v2(1521.77,863.66) ; v2(1088.7,903.03) v2(1167.44,903.03) v2(1206.81,903.03) v2(1403.66,903.03) v2(1443.03,903.03) v2(1482.4,903.03) v2(1521.77,903.03) ; v2(1088.7,942.4) v2(1167.44,942.4) v2(1206.81,942.4) v2(1403.66,942.4) v2(1443.03,942.4) v2(1482.4,942.4) v2(1521.77,942.4) ; v2(1088.7,981.77) v2(1285.55,981.77) v2(1324.92,981.77) v2(1364.29,981.77) v2(1403.66,981.77) v2(1443.03,981.77) v2(1482.4,981.77) v2(1521.77,981.77) ; v2(1088.7,1021.14) v2(1128.07,1021.14) v2(1167.44,1021.14) v2(1206.81,1021.14) v2(1246.18,1021.14) v2(1285.55,1021.14) v2(1324.92,1021.14) v2(1364.29,1021.14) v2(1403.66,1021.14) v2(1443.03,1021.14) v2(1482.4,1021.14) v2(1521.77,1021.14) ; v2(1088.7,1060.51) v2(1128.07,1060.51) v2(1167.44,1060.51) v2(1206.81,1060.51) v2(1246.18,1060.51) v2(1285.55,1060.51) v2(1324.92,1060.51) v2(1364.29,1060.51) v2(1403.66,1060.51) v2(1443.03,1060.51) v2(1482.4,1060.51) v2(1521.77,1060.51) ; v2(1088.7,1099.88) v2(1128.07,1099.88) v2(1167.44,1099.88) v2(1206.81,1099.88) v2(1246.18,1099.88) v2(1285.55,1099.88) v2(1324.92,1099.88) v2(1364.29,1099.88) v2(1403.66,1099.88) v2(1443.03,1099.88) v2(1482.4,1099.88) v2(1521.77,1099.88) v2(1521.77,1060.51) ; v2(1521.77,863.66) v2(1521.77,903.03) ; v2(1521.77,903.03) v2(1521.77,942.4) ; v2(1521.77,942.4) v2(1521.77,981.77) ; v2(1521.77,981.77) v2(1521.77,1021.14) ; v2(1521.77,1021.14) v2(1521.77,1060.51)
  other v1: 30,65 90,65 150,65 210,65 270,65 330,65 390,65 450,65 510,65 180,125 360,125 420,125 30,185 150,185 330,185 390,185 450,185 120,245 30,305 150,305 210,305 180,365 30,425 90,425 150,425 210,425 270,425 330,425 510,425 60,485 120,485 180,485 240,485 300,485 360,485 420,485 480,485 540,485 600,485 660,485 780,485 30,545 90,545 150,545 210,545 270,545 330,545 390,545 450,545 510,545 570,545 30,630 95,630 160,630 225.89,630 292.74,630 355,630 420,630 475,630 535,630 600,630 660,630 660,685 660,737.01 660,785 660,855 1640,880.64 1591.55,886.05 1631.34,985.57 1631.34,1037.25 660,1096.42 660,1145 660,1199.07 660,1260 660,1302.99 1064.11,1332.38 660,1344.59 660,1400 660,1430.26 697.5,1430.26 735,1430.26 771.57,1457.15 771.57,1497.5 772.87,1533.61 660,1552.49 697.5,1552.49 735,1552.49 660,1585 660,1625 660,1675 660,1725 660,1760
  other v2: 1246.18,824.29 1285.55,824.29 1324.92,824.29 1364.29,824.29 1482.4,824.29 1128.07,863.66 1482.4,863.66 1128.07,903.03 1246.18,903.03 1285.55,903.03 1324.92,903.03 1364.29,903.03 1128.07,942.4 1246.18,942.4 1285.55,942.4 1325.82,942.08 1364.29,942.4 1128.07,981.77 1167.44,981.77 1206.81,981.77 1246.18,981.77
  other v3: 960,71.97 467.88,447.12 386.64,448.36
MCLK: J2.16 R2.2 | length 1353.2
  Top Layer w10: v3@1591.55,836.44 1591.55,773.86 1732.35,633.05 1880.57,633.05 J2.16
  Top Layer w15: R2.2 v3(1008.83,1030)
  Bottom Layer w10: v3(1008.83,1030) 1036.33,1002.5 1036.33,824.02 1096.7,763.66 1515.2,763.66 v3(1591.55,840)
MDAT: J2.12 R1.2 | length 1200.2
  Top Layer w10: v3(1640,840) 1641.91,838.09 1875.53,838.09 J2.12
  Top Layer w15: R1.2 962.32,942.18 1008.56,942.18 v3(1008.83,941.91)
  Bottom Layer w10: v3(1008.83,941.91) 1008.83,811.17 1091.87,728.13 1528.13,728.13 v3(1640,840)
NetC7_1: C7.1 U2.9 | length 152.7
  Top Layer w15: U2.9 1465.82,652.04 1536.45,581.41 1536.45,574.18 1543.95,566.68 C7.1@1545.45,566.68
NetC10_1: C10.1 R7.1 | length 55.4
  Top Layer w15: R7.1 1313.9,514.07 1313.9,458.95 C10.1
NetC10_2: C10.2 C11.1 R6.1 R8.2 U2.8 | length 285.9
  Top Layer w15: C10.2 1370.45,459.28 1370.45,513.74 R6.1 1371.14,513.93 1427.58,513.93 C11.1 1428.09,513.95 1428.09,574.7 R8.2 1427.09,576.23 1427.09,684.24 U2.8
NetJ1_1: J1.1 U1.2 | length 219.9
  Top Layer w15: J1.1 393.45,1013.74 U1.2
NetJ2_5: J2.5 R3.2 | length 97.2
  Top Layer w10: R3.2 1731.64,1085.57 J2.5
NetJ2_8: J2.8 R4.1 | length 226.5
  Top Layer w10: R4.1@1724.63,929.8 1732.92,938.09 1880.57,938.09 J2.8
NetJ2_13: J2.13 R5.2 | length 1071.6
  Top Layer w10: R5.2 v3(1000,230)
  Bottom Layer w10: v3(1000,230) 1050,230 1260,440 1413.8,440 1659.38,685.57 J2.13
NetJ4_1: J4.1 U3.4 | length 347.6
  Top Layer w15: J4.1@193.07,230.43 J4.1 U3.4
NetR1_1: R1.1 U1.6 | length 217.2
  Top Layer w15: U1.6 871.86,963.74 893.15,942.45 R1.1
NetR2_1: R2.1 U1.7 | length 222.5
  Top Layer w15: U1.7 876.77,1013.74 893.03,1030 R2.1 R2.1@889.7,1024.7
NetR9_2: R9.2 U2.11 | length 116.2
  Top Layer w15: U2.11@1425.65,1234.36 1425.65,1348.94 R9.2 ; U2.11 U2.11@1426.38,1239.22
NetR10_1: R10.1 U3.15 | length 136.3
  Top Layer w15: U3.15 856.09,276.61 880.94,301.45 R10.1
PGOOD: J2.4 U2.18 | length 984.1
  Top Layer w15: v3(1112.38,1332.38) 1112.38,1330 1144.17,1298.21 1144.17,1240.31 U2.18
  Bottom Layer w10: v3(1112.38,1332.38) 1492.62,1332.38 1586.91,1238.09 1875.53,1238.09 J2.4
SCLK: R3.1 U3.16 | length 1479.8
  Top Layer w10: U3.16 803.66,302.2 v3(823.83,322.37) ; v3@1633.5,1085 R3.1
  Bottom Layer w10: v3(823.83,322.37) 873.83,322.37 1081.46,530 1393.64,530 1695,831.36 1695,1021.34 v3(1631.34,1085)
pads on no net: U3.5 U3.6 U3.7 U3.8 U3.9 U3.10 U3.11

## Polygon pours and split planes (outlines as drawn)
AGND on Top Layer "AGND_L01_P070" (solid, pour order 70): 0,1795 474.29,1795 525,1725 525,820 475,750 0,750
GND on Top Layer "GND_L01_P072" (solid, pour order 72): 645,1570 750,1570 790.47,1534.98 790.21,1445.51 750,1415 645,1415
3V3 on Top Layer "Top Layer-3V3" (solid, remove dead copper, pour order 44): 716.68,213 810.08,213 853.35,165.95 853.35,150.03 1039.86,149.99 1275.3,343.73 1274.93,527.29 1289.34,541.74 1388.83,541.74 1403.84,557.03 1400.49,733.67 1383.85,750 1198.29,750 1174.01,725.72 1174.01,530.55 1153.1,509.65 1078.67,509.65 1058.33,529.98 1058.33,577.76 1036.09,600 906.95,600 747.11,408.79 562.21,408.79 516.58,359.21 485.89,359.19 485.87,359.2 482.81,359.19 450.17,359.03 449.27,358.53 444.59,353.9 366.48,354.78 364.99,353.3 364.99,328.66 444.26,328.66 450.17,322.75 450.17,287.04 476.87,264.67 562.07,263.44 569.98,269.25 570.3,284.13 565.01,290.17 498.78,291.45 489.76,297.49 489.53,323.02 504.87,341.91 756.58,345.8 803.66,400 989.72,400 1034.98,357.39 1035.38,220.59 1000.7,192.45 863.17,193.24 810.04,244.4 716.68,246.54
GND on Top Layer "GND_L01_P026" (solid, remove dead copper, pour order 26): 609.66,600 780.04,600 789.55,590.57 790.5,477.28 761.45,447.98 573.05,447.98 505.18,376.91 373.28,376.82 323.42,326.48 323.88,280.71 340.03,264.74 580.19,265.19 576.89,0 0,0 0,591.21 592.93,589.63
+5V on Top Layer "Top Layer-+5V" (solid, remove dead copper, pour order 16): 1039.01,1220 1105,1220 1105,1177.56 1126.97,1155.59 1480.68,1155.59 1480.68,1155.68 1495,1170 1495,1220 1520,1245 1866.3,1245 1875,1253.09 1875,1315 1865,1325 1790,1325 1485.82,1325 1443.21,1282.39 1443.21,1193.38 1411.81,1193.38 1409.21,1190.79 1409.21,1375.67 1078.22,1375.67 1050,1403.89 1050,1535 1035,1550 903.89,1550 889.65,1535.76 889.65,1438.74 925,1403.39 925,1301.11 891.34,1267.45 850,1267.45 850.2,1130.68 979.19,1130.68
AGND on Bottom Layer "AGND_L04_P066" (solid, pour order 66): 0,1795 474.29,1795 525,1725 525,820 475,750 0,750
AGND on Layer 1 "AGND_L02_P068" (solid, pour order 68): 0,1795 474.29,1795 525,1725 525,820 475,750 0,750
GND on Layer 1 "GND_L02_P074" (solid, remove dead copper, pour order 74): 626.2,1795 624.94,780.42 540,664.18 0,664.18 0,0 2055,0 2055,1795
GND on Layer 2 "GND_L03_P075" (solid, remove dead copper, pour order 75): 626.2,1795 624.95,780.42 540,664.18 0,664.18 0,0 2055,0 2055,1795
AGND on Layer 2 "AGND_L03_P069" (solid, pour order 69): 0,1795 474.29,1795 525,1725 525,820 475,750 0,750

## Text inside footprints (layer, text, board x,y; h text height)
C5: Top Overlay "+" at 1016.26,1382.67 h60 r180
C9: Top Overlay "+" at 1016.26,442.67 h60 r180
J2: Top Overlay "2" at 1913.49,1381.24 h40 r270; Top Overlay "1" at 1807.19,1369.43 h40 r270; Top Overlay "15" at 1807.19,517.46 h40 r270; Top Overlay "16" at 1913.49,517.46 h40 r270